# EAGLE board Quad_ESC_adapter (EAGLE 9.6.2)
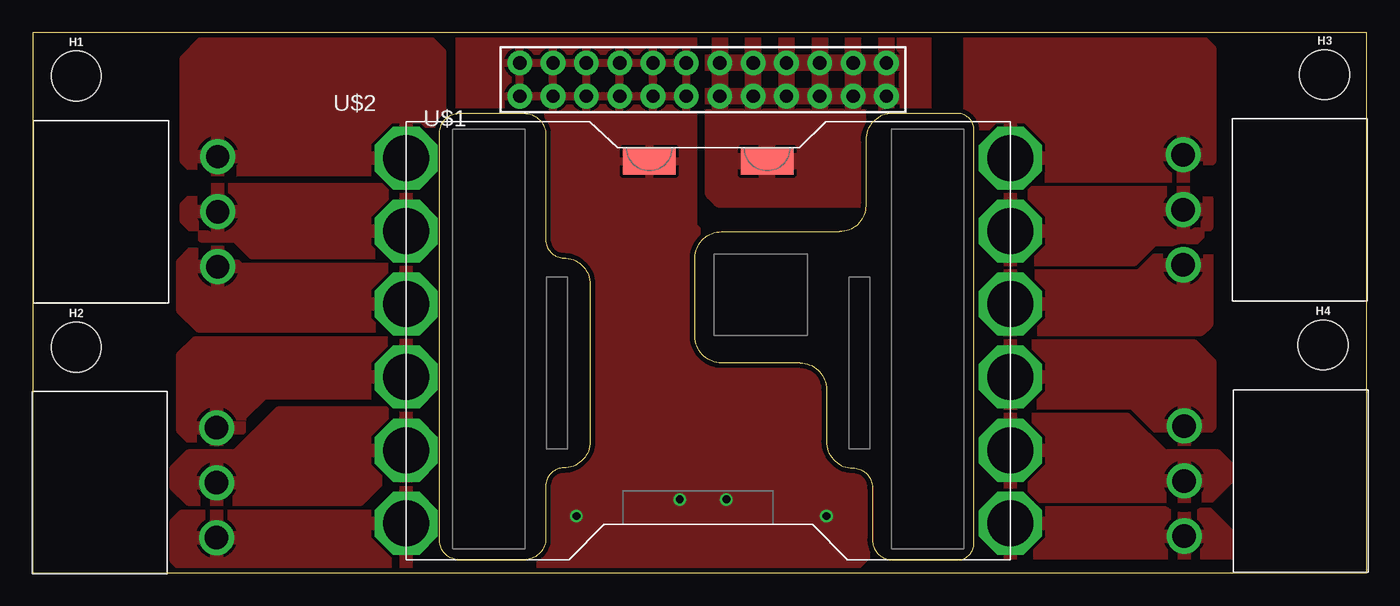
[diagram p0: board, top side]
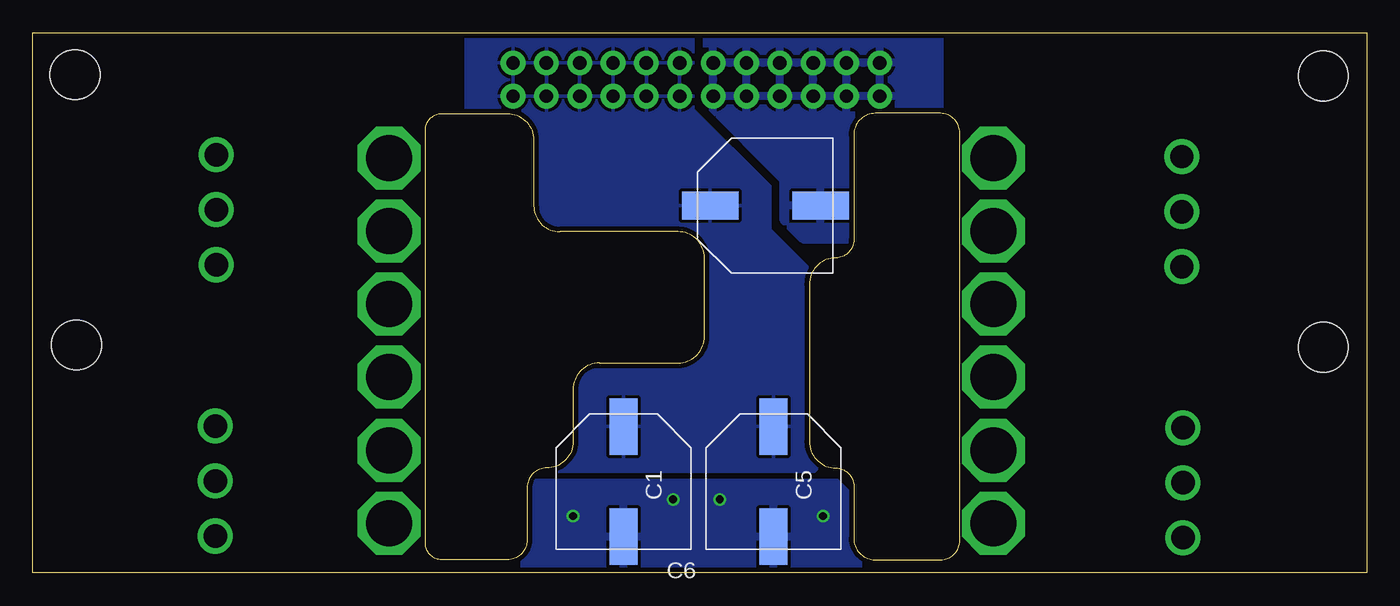
[diagram p1: board, bottom side, seen from below]

Size 101.6 x 41.15 mm. Coordinates in mm from the lower left corner, seen from the top.
Outline: 0,0 101.6,0 101.6,41.15 0,41.15 0,0
Copper layers (1*16): Top 0.0356mm / dielectric 1.5011mm / Bottom 0.0356mm
Design rules "ECE_Senior_Design": minimum track width 8mil, minimum drill 13mil, track to track 8mil, track to pad 8mil, pad to pad 6mil, via to via 8mil, smd to smd 6mil, copper to edge 15mil, drill to drill 8mil, minimum pad ring 7mil, minimum via ring 7mil, stop-mask expansion 3mil, vias tented up to drill 0mil, thermal gap 10mil

## Footprints (pad centres in the part's own frame; a part is rotated, then mirrored left to right if it is on the bottom)
CAPAE1030X1050N = smd 4.3 x 2.15: + -4.2,0; - 4.2,0
6-32-HOLE = hole 3.81: 0,0
IPBD-03-S-K = drill 1.778 pad 2.54: 1 -4.191,-3.747; 2 0,-3.747; 3 4.191,-3.747
LUMENIER_QUAD = drill 3.5 pad 4.8 octagon: 1 0,30.62; 2 0,25.05; 3 0,19.48; 4 0,13.92; 5 0,8.35; 6 0,2.78; 7 46,2.78; 8 46,8.35; 9 46,13.92; 10 46,19.48; 11 46,25.05; 12 46,30.62 | smd 4 x 2: GND 18.51,30.37; VIN 27.49,30.37
BACKPLANE_ESC_ADAPTER_ESC_PWR = drill 1.016 pad 1.88: 12V@1 65.024,36.322; 12V@2 65.024,38.862; 12V@3 62.484,36.322; 12V@4 62.484,38.862; 12V@5 59.944,36.322; 12V@6 59.944,38.862; 12V@7 57.404,36.322; 12V@8 57.404,38.862; 12V@9 54.864,36.322; 12V@10 54.864,38.862; 12V@11 52.324,36.322; 12V@12 52.324,38.862; GND@1 49.784,38.862; GND@2 49.784,36.322; GND@3 47.244,38.862; GND@4 47.244,36.322; GND@5 44.704,38.862; GND@6 44.704,36.322; GND@7 42.164,38.862; GND@8 42.164,36.322; GND@9 39.624,38.862; GND@10 39.624,36.322; GND@11 37.084,38.862; GND@12 37.084,36.322

## Placement (x,y rotation side)
C1  330uF  [CAPAE1030X1050N]  56.61,6.94 270 bottom
C5  330uF  [CAPAE1030X1050N]  45.18,6.94 270 bottom
C6  330uF  [CAPAE1030X1050N]  45.8,27.97 0 bottom
H1  6-32-HOLE  [6-32-HOLE]  3.3,37.85 0 top
H2  6-32-HOLE  [6-32-HOLE]  3.3,17.19 0 top
H3  6-32-HOLE  [6-32-HOLE]  98.4,37.95 0 top
H4  6-32-HOLE  [6-32-HOLE]  98.26,17.36 0 top
J1  IBPD-SOCKET  [IPBD-03-S-K]  10.33,27.52 90 top
J2  IBPD-SOCKET  [IPBD-03-S-K]  10.25,6.86 90 top
J3  IBPD-SOCKET  [IPBD-03-S-K]  91.37,27.66 270 top
J4  IBPD-SOCKET  [IPBD-03-S-K]  91.44,6.99 270 top
U$1  LUMENIER_QUAD  [LUMENIER_QUAD]  28.45,0.99 0 top
U$2  BACKPLANE_ESC_ADAPTER_PWRESC  [BACKPLANE_ESC_ADAPTER_ESC_PWR]  0,0 0 top

## Library data of the parts
C1 C5 C6 = CAP, aluminin-capacitor-brick-UCM1H331MNL1GS; ARROW_PART_NUMBER: UCM1H331MNL1GS; ARROW_PRICE-STOCK: https://www.arrow.com/en/products/ucm1h331mnl1gs/nichicon; DESCRIPTION: Nichicon 330uF 50 V Aluminium Electrolytic Capacitor SMD, CM Series 2000h 10 (Dia.) x 10mm; HEIGHT: 10.5mm; MANUFACTURER_NAME: Nichicon; MANUFACTURER_PART_NUMBER: UCM1H331MNL1GS; MOUSER_PART_NUMBER: 647-UCM1H331MNL1GS; MOUSER_PRICE-STOCK: https://www.mouser.co.uk/ProductDetail/Nichicon/UCM1H331MNL1GS?qs=DSgADHjnLTkTovFLdbC%252BNg%3D%3D
H1-H4 = Mounting Holes
J1-J4 = CONN, IPBD-03-S-K
U$1 = AUX, Lumenier ESC
U$2 = Backplane_ESC_adapter

## Nets
12V: C1.+ C5.+ C6.+ U$1.VIN U$2.12V@1 U$2.12V@2 U$2.12V@3 U$2.12V@4 U$2.12V@5 U$2.12V@6 U$2.12V@7 U$2.12V@8 U$2.12V@9 U$2.12V@10 U$2.12V@11 U$2.12V@12
ESC1_B: J1.3 U$1.1
ESC1_R: J1.1 U$1.3
ESC1_Y: J1.2 U$1.2
ESC2_B: J2.3 U$1.4
ESC2_R: J2.1 U$1.6
ESC2_Y: J2.2 U$1.5
ESC3_B: J3.1 U$1.12
ESC3_R: J3.3 U$1.10
ESC3_Y: J3.2 U$1.11
ESC4_B: J4.1 U$1.9
ESC4_R: J4.3 U$1.7
ESC4_Y: J4.2 U$1.8
GND: C1.- C5.- C6.- U$1.GND U$2.GND@1 U$2.GND@2 U$2.GND@3 U$2.GND@4 U$2.GND@5 U$2.GND@6 U$2.GND@7 U$2.GND@8 U$2.GND@9 U$2.GND@10 U$2.GND@11 U$2.GND@12

## Tracks (layer width: path | path; a pad name or v marks a point on that pad's centre or on a via)
12V
  pour Top (isolate 0.254): 53.09,43.43 51.82,42.16 51.82,28.96 52.32,28.45 65.79,28.45 67.82,30.48 67.82,42.67 67.06,43.43
  pour Bottom (isolate 0.254): 53.34,44.45 66.55,44.45 68.58,42.42 68.58,30.99 66.29,28.7 66.29,11.18 62.84,7.72 42.06,7.72 39.88,9.91 39.88,21.84 41.15,23.11 42.42,23.11 45.47,26.16 45.47,29.46 51.31,35.31 51.31,42.42
ESC1_B
  pour Top (isolate 0.254): 11.68,31.5 12.45,30.73 29.21,30.73 30.99,32.51 30.99,39.62 30.23,40.39 12.95,40.39 11.68,39.12
ESC1_R
  pour Top (isolate 0.254): 11.43,23.62 12.19,24.38 14.48,24.38 15.75,23.11 30.23,23.11 30.99,22.35 30.99,19.81 29.97,18.8 12.7,18.8 11.43,20.07
ESC1_Y
  pour Top (isolate 0.254): 11.68,27.94 12.95,29.21 29.97,29.21 30.99,28.19 30.99,26.16 29.21,24.38 16.76,24.38 15.49,25.65 12.95,25.65 11.68,26.92
ESC2_B
  pour Top (isolate 0.254): 30.73,17.02 30.23,17.53 12.45,17.53 11.43,16.51 11.43,10.92 12.19,10.16 14.99,10.16 15.75,10.92 15.75,11.94 17.53,13.72 29.72,13.72 30.73,14.73
ESC2_R
  pour Top (isolate 0.254): 25.65,4.32 27.43,6.1 29.97,6.1 31.24,4.83 31.24,1.02 30.48,0.25 11.68,0.25 10.92,1.02 10.92,3.81 11.43,4.32
ESC2_Y
  pour Top (isolate 0.254): 29.72,12.19 30.73,11.18 30.73,8.89 29.21,7.37 26.67,7.37 24.89,5.59 11.94,5.59 10.92,6.6 10.92,7.87 11.94,8.89 15.49,8.89 18.8,12.19
ESC3_B
  pour Top: 72.14,41.66 87.88,41.66 89.66,39.88 89.66,31.5 88.39,30.23 72.14,30.23 71.37,30.99 71.37,40.89
ESC3_R
  pour Top (isolate 0.254): 71.12,22.1 71.63,22.61 84.33,22.61 85.85,24.13 89.41,24.13 89.41,19.05 88.9,18.54 71.37,18.54 71.12,18.8
ESC3_Y
  pour Top (isolate 0.254): 70.87,27.43 72.39,28.96 88.9,28.96 89.41,28.45 89.41,26.42 88.39,25.4 85.34,25.4 83.82,23.88 71.88,23.88 70.87,24.89
ESC4_B
  pour Top (isolate 0.254): 71.37,16.51 72.14,17.27 88.39,17.27 89.66,16 89.66,11.18 88.65,10.16 86.61,10.16 83.82,12.95 72.39,12.95 71.37,13.97
ESC4_R
  pour Top (isolate 1.016): 71.88,5.33 75.44,5.33 76.2,4.57 89.41,4.57 90.93,3.05 90.93,1.27 90.17,0.51 72.39,0.51 71.12,1.78 71.12,4.57
ESC4_Y
  pour Top (isolate 0.254): 71.37,11.18 71.88,11.68 83.31,11.68 86.11,8.89 90.17,8.89 90.93,8.13 90.93,7.11 89.66,5.84 76.71,5.84 75.95,6.6 72.14,6.6 71.37,7.37
GND  (via drill 0.6)
  other vias: 41.4,4.32 60.45,4.32 52.83,5.59 49.28,5.59
  pour Top (isolate 0.254): 34.29,44.45 47.24,44.45 50.29,41.4 50.29,26.42 60.2,16.51 63.75,12.95 63.75,4.32 63.75,1.52 59.18,-3.05 40.64,-3.05 36.58,1.02 36.58,30.48 34.04,33.02 32.51,34.54 32.51,43.18 33.78,44.45
  pour Bottom (isolate 0.254): 39.12,5.59 40.39,6.86 47.24,6.86 64.52,6.86 66.8,4.57 66.8,2.03 63.5,-1.27 60.2,-4.57 48.26,-4.57 40.89,-4.57 36.07,0.25 36.07,2.54
  pour Bottom (isolate 0.254): 36.07,46.48 45.21,46.48 50.29,41.4 50.29,35.81 44.45,29.97 44.45,26.92 42.93,25.4 37.85,25.4 32.51,30.73 32.51,42.93